# Altium PCB PCB.PcbDoc
Units mm, origin at the board's own origin, x right, y up, seen from the top; angles counter-clockwise.
Board outline 100 x 100 mm, 2 copper layers (Top Layer, Bottom Layer); 25 components, 25 nets, 91 pads, 0 vias.
Unrouted connection lines stored in the file: 59.
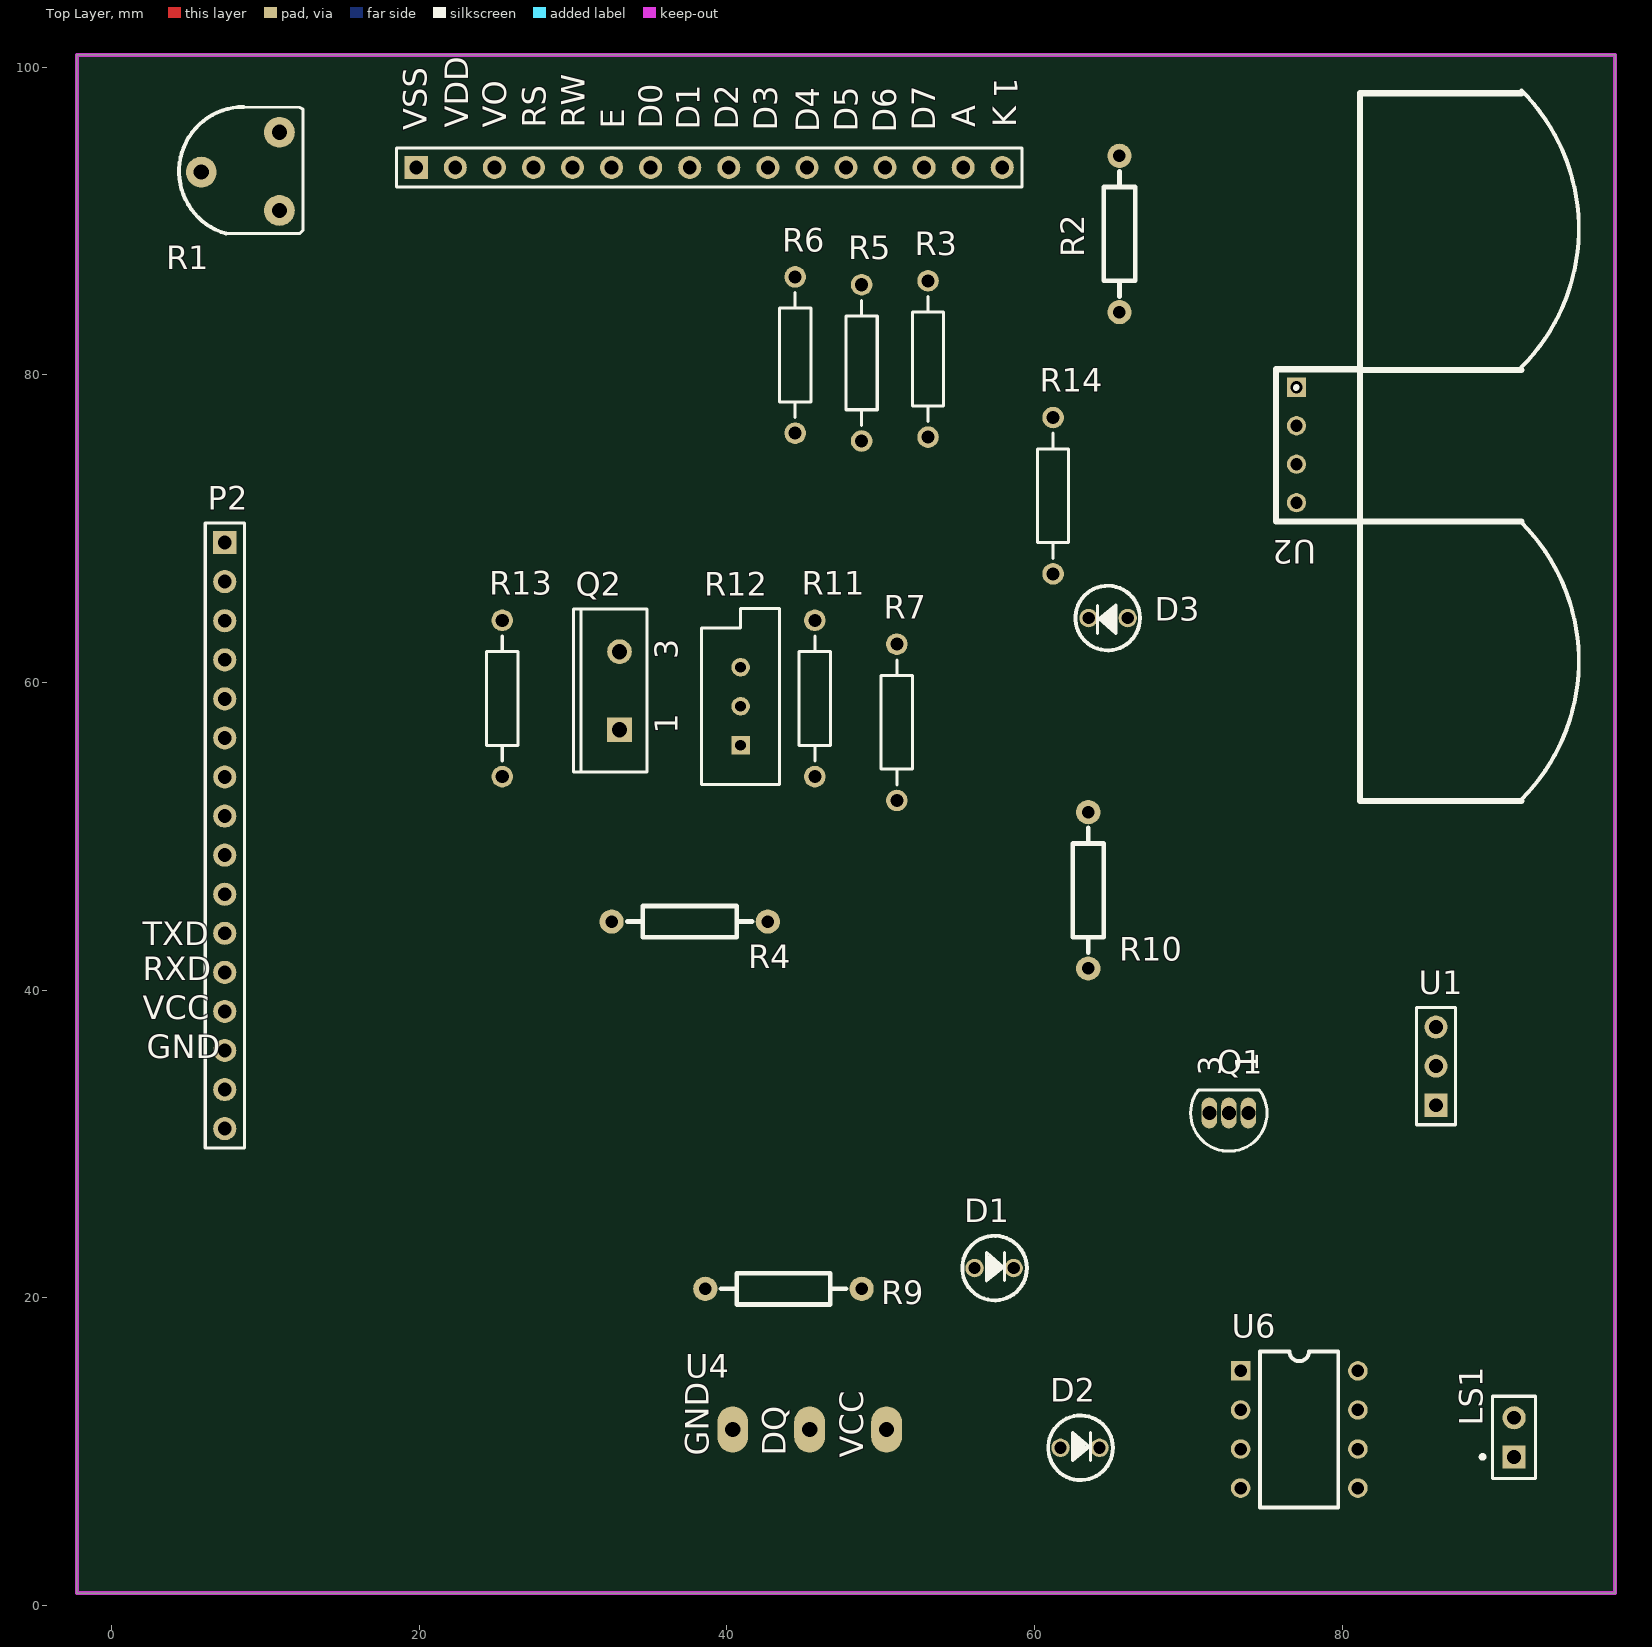
[diagram p0: Top Layer view]
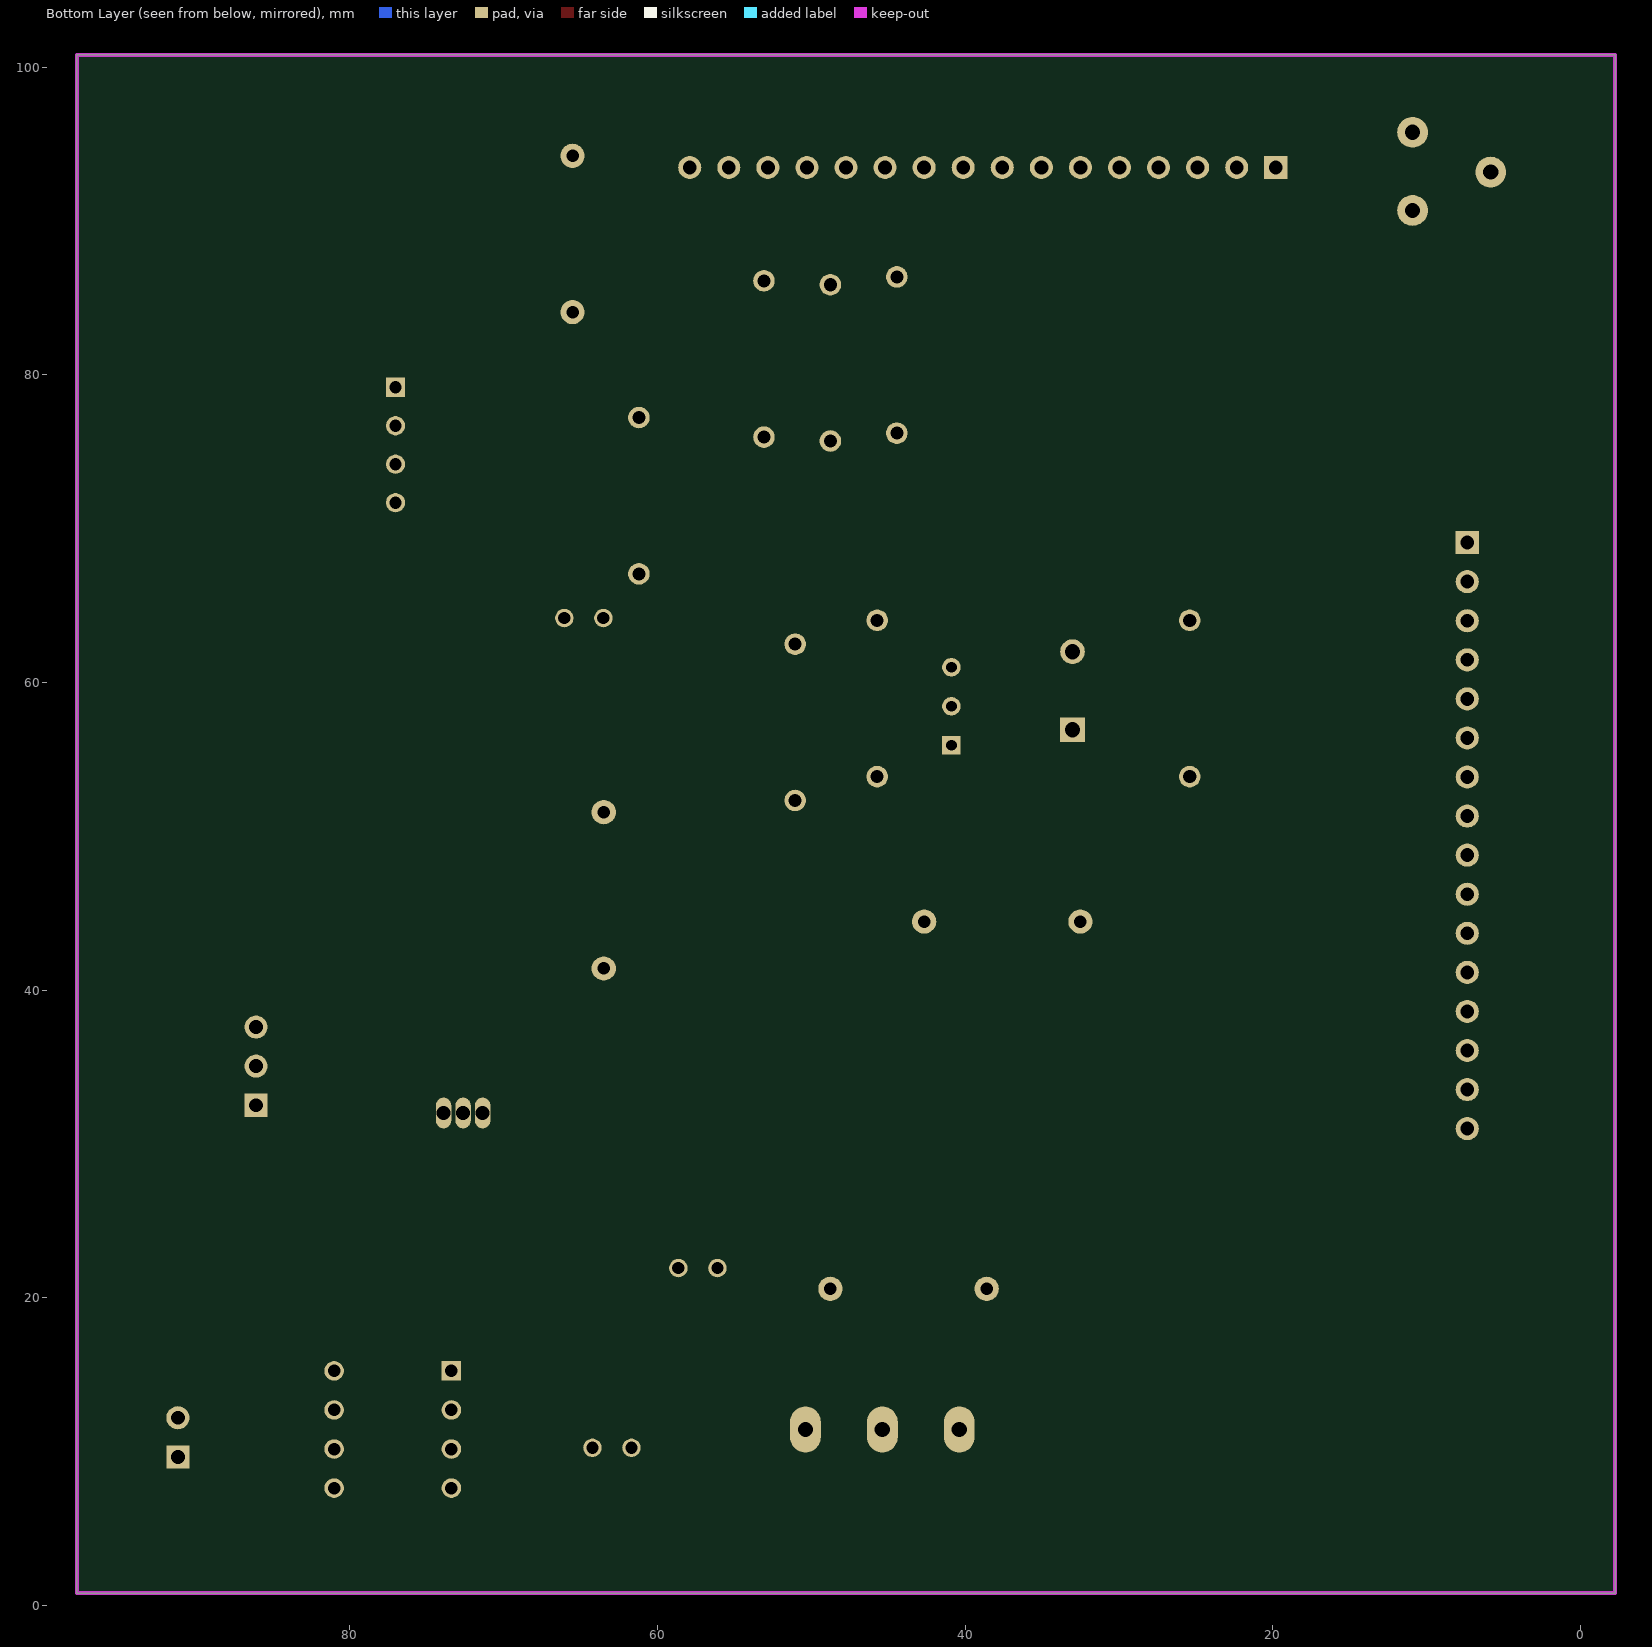
[diagram p1: Bottom Layer view, seen from below]

## Layer stack, top to bottom
Top Layer: signal copper 0.0356
Dielectric: dielectric 0.32, FR-4, Dk 4.8
Bottom Layer: signal copper 0.0356

## Board outline
-2.248,0.794 -2.248,100.794 97.752,100.794 97.752,0.794

## Design rules (kind name [scope] priority, off if disabled: settings)
Clearance [All] p1: gap=0.2
ComponentClearance [All] p1: gap=0 collisioncheckmode=3 verticalgap=0
PlaneClearance [All] p1: clearance=0.1
PlaneConnect [All] p1: planeconnectstyle=Relief reliefexpansion=1 reliefentries=4 reliefconductorwidth=0.254 reliefairgap=0.254
PolygonConnect [All] p1: connectstyle=Relief reliefconductorwidth=0.254 reliefentries=4 polygonreliefangle="90 Angle"
RoutingCorners [All] p1: cornerstyle=45-Degree minsetback=0.025 maxsetback=2.54
RoutingLayers RoutingLayers_1 [All] p1: top layer_v5=TRUE bottom layer_v5=TRUE
RoutingLayers [All] p2: top layer_v5=TRUE bottom layer_v5=TRUE
RoutingVias [All] p1: holewidth=0.3 width=0.7 viastyle="Through Hole" minholewidth=0.178 minwidth=0.508 maxholewidth=0.711 maxwidth=1.27
SMDNeckDown [All] p1: percent=100.000
ShortCircuit [All] p1: allowed=TRUE
SolderMaskExpansion [All] p1: expansion=0.2
TestPointUsage [All] p1: valid=0 allowmultiple=FALSE
Testpoint [All] p1: side=15 testpointundercomponent=TRUE minsize=1.016 maxsize=2.54 preferedsize=1.524 minholesize=0 maxholesize=1.016 preferedholesize=0.813 testpointgrid=0.025 style=1023 order=0123456789
Width Width_1 [InNet('VCC')] p1: maxlimit=2 minlimit=0.254 preferedwidth=1
13 further rules are at their usual default settings.

## Components (designator, comment, footprint, x,y, rotation, side; value= is the part's Value field where it differs from the comment)
1 "LCD 1602" 1602SW 19.812,93.472 r0 top
D1 "" led_3MM 57.15,21.844 r0 top
D2 "LED0" LED_3MM 62.738,10.16 r0 top
D3 "" LED_3MM 65.024,64.262 r180 top
LS1 "Speaker" PIN2 91.186,9.652 r90 top
P2 "Header 16" HDR1X16 7.366,69.088 r270 top
Q1 "2N3906" TO-92A 72.644,32.004 r90 top
Q2 "Photo NPN" TO-220_A 33.026,59.462 r90 top
R1 "10K" RB 10.922,90.678 r90 top
R2 "1K" AXIAL-0.4#1 65.532,84.074 r90 top
R3 "10k" AXIAL-0.4#2 53.086,81.026 r270 top
R4 "10K" AXIAL-0.4#1 32.512,44.45 r0 top
R5 "10k" AXIAL-0.4#2 48.768,80.772 r270 top
R6 "10k" AXIAL-0.4#2 44.45,81.28 r270 top
R7 "1K" AXIAL-0.4#2 51.054,57.404 r90 top
R9 "10K" AXIAL-0.4#1 38.608,20.574 r0 top
R10 "1K" AXIAL-0.4#1 63.5,51.562 r270 top
R11 "1K" AXIAL-0.4#2 45.726,58.954 r90 top
R12 "10k" VR5 40.9,58.446 r90 top
R13 "1k" AXIAL-0.4#2 25.406,58.954 r90 top
R14 "10K" AXIAL-0.4#2 61.214,72.136 r90 top
U1 "HC_SR501红外热释电模块" HDR1X3 86.106,32.512 r90 top
U2 "超声波模块" HC-SR04 77.216,78.994 r270 top
U4 "DS18B20" 1820 40.386,11.43 r0 top
U6 "LM393N" DIP8 73.406,15.24 r0 top

## Footprints (in the part's own frame and the unit in brackets; to place one, negate y for a bottom-side part, rotate by r counter-clockwise, add the part's x,y. Pads: shape width x height; smd on the part's side, far side on the other; paste and mask are expansions set on the pad)
1602SW [mm]
  rect 1.5x1.5 hole 0.9: 1(0,0)
  round 1.5 hole 0.9: 2(2.54,0) 3(5.08,0) 4(7.62,0) 5(10.16,0) 6(12.7,0) 7(15.24,0) 8(17.78,0) 9(20.32,0) 10(22.86,0) 11(25.4,0) 12(27.94,0) 13(30.48,0) 14(33.02,0) 15(35.56,0) 16(38.1,0)
  silkscreen extent -1.27,-1.27 39.37,1.27
1820 [mm]
  oval 2x3 hole 1: 1(0,0) 2(5,0) 3(10,0)
AXIAL-0.4#1 [mil]
  round 62 hole 32: 1(0,0) 2(400,0)
  silkscreen extent 40,-40 360,40
AXIAL-0.4#2 [mil] "Resistor; 2 Leads"
  round 55.12 hole 33.46: 1(-200,0) 2(200,0)
  silkscreen extent -160,-40 160,40
DIP8 [mil]
  rect 50x50 hole 32: 1(0,0)
  round 50 hole 32: 2(0,-100) 3(0,-200) 4(0,-300) 5(300,-300) 6(300,-200) 7(300,-100) 8(300,0)
  silkscreen extent 50,-350 250,50
HC-SR04 [mm]
  rect 1.25x1.25 hole 0.8: 1(-0.19,-0.18)
  round 1.25 hole 0.8: 2(2.31,-0.18) 3(4.81,-0.18) 4(7.31,-0.18)
  silkscreen extent -19.49,-1.5 26.71,18.17
HDR1X3 [mm] "Connector; Header; 3 Position"
  rect 1.5x1.5 hole 0.9: 1(0,0)
  round 1.5 hole 0.9: 2(2.54,0) 3(5.08,0)
  silkscreen extent -1.27,-1.27 6.35,1.27
HDR1X16 [mm] "Connector; Header; 16 Position"
  rect 1.5x1.5 hole 0.9: 1(0,0)
  round 1.5 hole 0.9: 2(2.54,0) 3(5.08,0) 4(7.62,0) 5(10.16,0) 6(12.7,0) 7(15.24,0) 8(17.78,0) 9(20.32,0) 10(22.86,0) 11(25.4,0) 12(27.94,0) 13(30.48,0) 14(33.02,0) 15(35.56,0) 16(38.1,0)
  silkscreen extent -1.27,-1.27 39.37,1.27
led_3MM [mm]
  round 1.2 hole 0.8: 1(-1.04,0.08) 2(1.5,0.08)
  silkscreen extent -1.84,-2.02 2.36,2.18
LED_3MM [mm]
  round 1.2 hole 0.8: 1(-1.04,0.08) 2(1.5,0.08)
  silkscreen extent -1.84,-2.02 2.36,2.18
PIN2 [mm] "Photosensitive Diode; 2 Leads"
  rect 1.5x1.5 hole 0.9: 1(0,0)
  round 1.5 hole 0.9: 2(2.54,0)
  silkscreen extent -1.4,-1.4 3.94,2.17
RB [mm]
  round 2 hole 1: 1(0,0) 2(5.08,0) 3(2.5,5.08)
  silkscreen extent -1.5,-1.52 6.74,6.53
TO-92A [mm] "TO, Flat Index; 3 In-Line, Axial Leads; Body Dia. 4.5mm; Leads 0.51 x 0.48 mm (max)"
  oval 2x1 hole 0.9: 1(0,-1.27) 2(0,0) 3(0,1.27)
  silkscreen extent -2.48,-2.48 1.5,2.48
TO-220_A [mm] "TO, Thru-Hole, Vertical, Heatsink Mounted; 3 In-Line Leads (1 Absent); Pitch 2.54 mm"
  rect 1.6x1.6 hole 1: 1(-2.54,0)
  round 1.6 hole 1: 3(2.54,0)
  silkscreen extent -5.3,-1.8 5.3,3
VR5 [mm] "Potentiometer; 3 Leads"
  rect 1.2x1.2 hole 0.7: 1(-2.54,0)
  round 1.2 hole 0.7: 2(0,0) 3(2.54,0)
  silkscreen extent -5.08,-2.54 6.35,2.54

## Part data
1: library part LCD
D1 D3: library part LED0, "Typical INFRARED GaAs LED"
D2: "Typical INFRARED GaAs LED"
LS1: "Loudspeaker"
P2: "Header, 16-Pin"
Q1: "PNP General Purpose Amplifier"
Q2: "NPN Phototransistor"
R1: library part "Res Tap", "Tapped Resistor"
R2 R3 R4 R5 R6 R7 R9 R10 R13: library part Res2, "Resistor"
R11: library part RES1
R12: library part RPot, "Potentiometer"
R14: library part RES, "RES"
U1: library part IR38
U2: library part MQ系列模块
U6: "Low-Power Low Offset Voltage Dual Comparator"

## Nets (pads, with @x,y where several pads share a name; then routed paths per layer and width w, separated by ;. In a path a pad name is that pad's centre, name@x,y a point inside that pad or via, vN(x,y) a via of type N, cw(c..) or ccw(c..) an arc to the next point about the centre after c; other vN are vias at no path point)
+3.3V: D3.1 LS1.1 P2.16 Q2.1 R9.2 R12.2 U4.3 U6.8
D4: 1.11 P2.6 R6.1
D5: 1.12 P2.5 R5.1
D6: 1.13 P2.4 R4.1
D7: 1.14 P2.3 R3.1
GND: 1.1 1.5 D2.2 P2.14 Q1.3 R1.1 R2.1 R7.1 R12.1 R14.2 U1.2 U2.1 U4.1 U6.4
Net1_3: 1.3 R1.2 R1.3
Net1_16: 1.16 R2.2
NetD1_2: D1.2 R7.2
NetD2_1: D2.1 R11.1
NetD3_2: D3.2 R13.2
NetLS1_2: LS1.2 Q1.1
NetP2_13: P2.13 R13.1 U6.1
NetQ1_2: Q1.2 R10.1
NetQ2_3: Q2.3 R14.1 U6.3
NetR12_3: R12.3 U6.2
P10: 1.4 P2.1
P11: 1.6 P2.2
P13: P2.10 R9.1 U4.2
P20: D1.1 P2.7 U1.1
P21: P2.9 U2.3
P22: P2.8 U2.2
P24: P2.12 R11.2
P25: P2.11 R10.2
VCC: 1.2 1.15 P2.15 R3.2 R4.2 R5.2 R6.2 U1.3 U2.4
pads on no net: 1.7 1.8 1.9 1.10 U6.5 U6.6 U6.7

## Keep-outs
Keep-Out Layer:
  the board outline again, w0.254

## Silkscreen, mask and mechanical layers (free items; w line width, h text height)
Top Overlay:
  text "TXD" at 2.032,42.926 h1.52
  text "RXD" at 2.032,40.64 h1.52
  text "VCC" at 2.032,38.1 h1.52
  text "GND" at 2.286,35.56 h1.52

## Text inside footprints (layer, text, board x,y; h text height)
1: Top Overlay "VSS" at 20.508,95.902 h1.52 r90; Top Overlay "VDD" at 23.208,96.052 h1.52 r90; Top Overlay "VO" at 25.678,96.052 h1.52 r90; Top Overlay "RS" at 28.248,96.052 h1.52 r90; Top Overlay "RW" at 30.758,96.052 h1.52 r90; Top Overlay "E" at 33.328,96.002 h1.52 r90; Top Overlay "D0" at 35.798,96.002 h1.52 r90; Top Overlay "D1" at 38.229,95.93 h1.52 r90; Top Overlay "D2" at 40.736,95.916 h1.52 r90; Top Overlay "D3" at 43.298,95.862 h1.52 r90; Top Overlay "D4" at 46.008,95.762 h1.52 r90; Top Overlay "D5" at 48.528,95.812 h1.52 r90; Top Overlay "D6" at 51.018,95.722 h1.52 r90; Top Overlay "D7" at 53.558,95.862 h1.52 r90; Top Overlay "A" at 56.168,96.092 h1.52 r90; Top Overlay "K" at 58.828,96.092 h1.52 r90
Q1: Top Overlay "3" at 72.134,34.434 h1.5 r90; Top Overlay "1" at 74.544,34.664 h1.5 r90
Q2: Top Overlay "3" at 36.801,61.502 h1.5 r90; Top Overlay "1" at 36.801,56.672 h1.5 r90
U4: Top Overlay "VCC" at 48.876,9.61 h1.52 r90; Top Overlay "DQ" at 43.836,9.72 h1.52 r90; Top Overlay "GND" at 38.826,9.72 h1.52 r90